# Altium PCB RGB Mcu Badge.PcbDoc
Units mm, origin at the board's own origin, x right, y up, seen from the top; angles counter-clockwise.
Board outline 15 x 15 mm, 4 copper layers (Top Layer, Layer 1, Layer 2, Bottom Layer), stack 0.771 mm thick; 30 components, 23 nets, 90 pads, 29 vias.
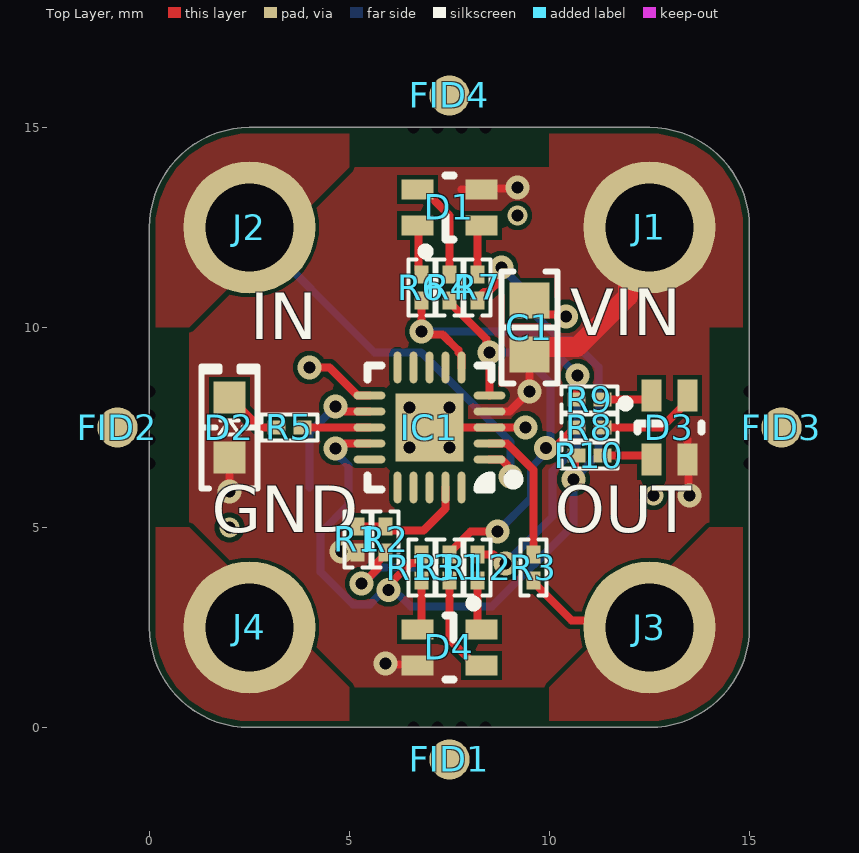
[diagram p0: Top Layer view]
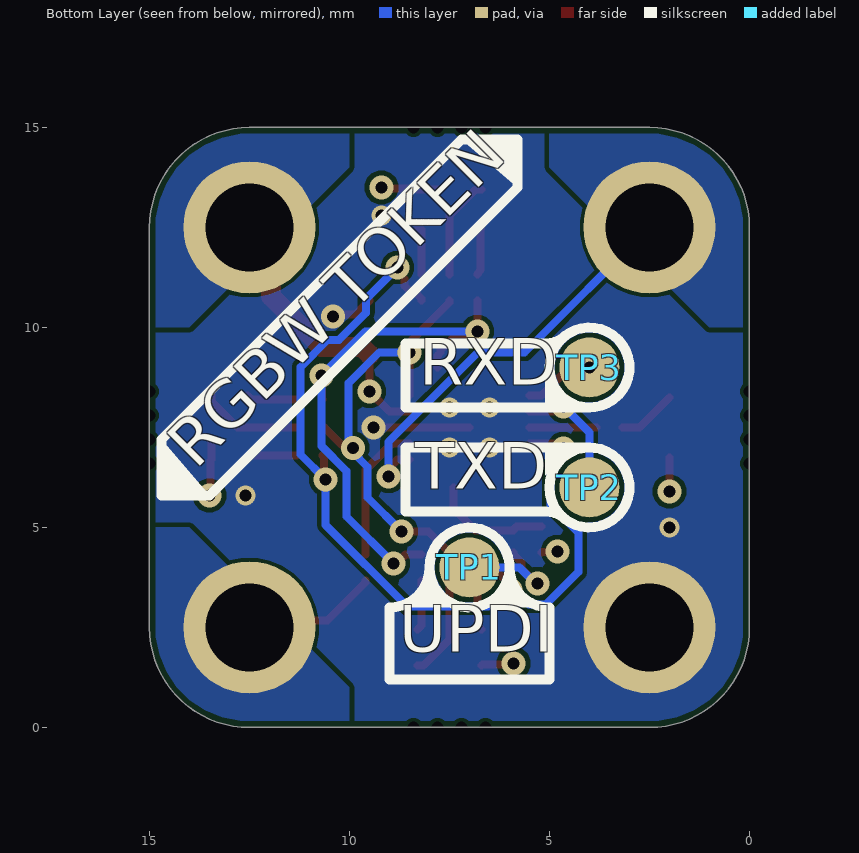
[diagram p1: Bottom Layer view, seen from below]
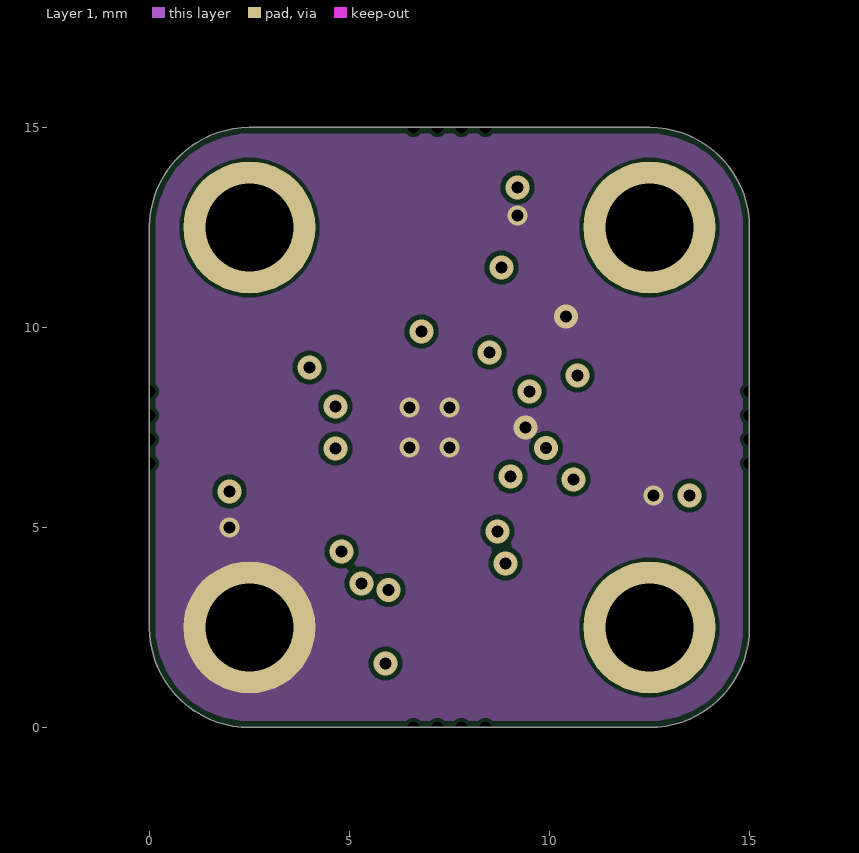
[diagram p2: Layer 1]
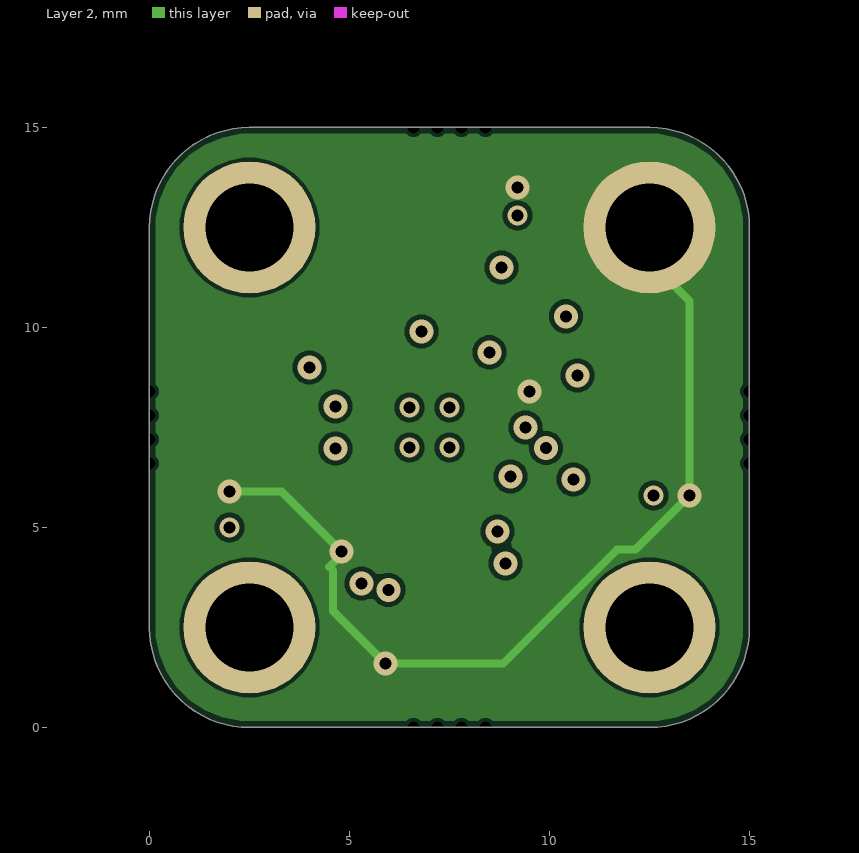
[diagram p3: Layer 2]

## Layer stack, top to bottom
Top Solder: solder mask 0.0102, Solder Resist, Dk 3.8
Top Layer: signal copper 0.035
Dielectric 2: prepreg 0.2104, PP-006, Dk 4.4
Layer 1: signal copper 0.0152
Dielectric 1: dielectric 0.25, FR-4, Dk 4.6
Layer 2: signal copper 0.0152
Dielectric 3: prepreg 0.2104, PP-006, Dk 4.4
Bottom Layer: signal copper 0.035
Bottom Solder: solder mask 0.0102, Solder Resist, Dk 3.8

## Board outline
0,2.5 0,12.5 cw(c2.5,12.5) 2.5,15 12.5,15 cw(c12.5,12.5) 15,12.5 15,2.5 cw(c12.5,2.5) 12.5,0 2.5,0 cw(c2.5,2.5)

## Design rules (kind name [scope] priority, off if disabled: settings)
BoardOutlineClearance [All] p1: gap=0.15 ignorepadtopadclearanceinfootprint=FALSE
Clearance [All] p1: gap=0.12 ignorepadtopadclearanceinfootprint=FALSE except(0.09: Arc-Text Arc-Hole Track-Text Track-Hole SMDPad-SMDPad SMDPad-Text SMDPad-Hole THPad-Via THPad-Fill THPad-Poly THPad-Region THPad-Text THPad-Hole Via-Via Via-Text Via-Hole Fill-Text Fill-Hole Poly-Text Poly-Hole Region-Text Region-Hole Text-Text Text-Hole; 0.2: Arc-THPad Track-THPad SMDPad-THPad; 0.5: THPad-THPad)
ComponentClearance [All] p1: gap=0.254 collisioncheckmode=3 verticalgap=0.254 showdistances=TRUE
MinimumSolderMaskSliver [All] p1: minsoldermaskwidth=0.1
PlaneClearance [All] p1: clearance=0.2
PolygonConnect [All] p1: connectstyle=Direct reliefconductorwidth=0.254 reliefentries=4 polygonreliefangle="90 Angle" airgapwidth=0.254
RoutingVias [All] p1: holewidth=0.3 width=0.6 viastyle="Through Hole" minholewidth=0.15 minwidth=0.45 maxholewidth=6.3 maxwidth=6.6
SilkToSilkClearance [All] p1: silktosilkclearance=-3
SilkToSolderMaskClearance [IsPad] p1: minsilkscreentomaskgap=-3 clearancetoexposedcopper=TRUE
SolderMaskExpansion SolderMaskExpansion_Via [IsVia] p1: expansion=0.102 istentingtop=TRUE
SolderMaskExpansion [All] p2: expansion=0.05 istentingtop=FALSE
Width [All] p1: maxlimit=3 minlimit=0.09 preferedwidth=0.2
25 further rules are at their usual default settings.

## Classes and differential pairs
component class "MCU RGB": C1 D1 D2 D3 D4 FID1 FID2 IC1 J1 J2 J3 J4 R1 R2 R3 R4 R5 R6 R7 R8 R9 R10 R11 R12 R13 TP1 TP2 TP3

## Components (designator, comment, footprint, x,y, rotation, side; value= is the part's Value field where it differs from the comment)
C1 "1 µF" "CAP 0603_1608" 9.5,10 r270 top
D1 "Red, Green, Blue (RGB)" "Harvatek B38G3RGB-10D0003H2U1930" 7.5,13 r90 top
D2 "White" "LED 0603_1608" 2,7.5 r90 top
D3 "Red, Green, Blue (RGB)" "Harvatek B38G3RGB-10D0003H2U1930" 13,7.5 r0 top
D4 "Red, Green, Blue (RGB)" "Harvatek B38G3RGB-10D0003H2U1930" 7.5,2 r270 top
FID1 "Fiducial" Fiducial-1mm 7.5,-0.8 r90 top
FID2 "Fiducial" Fiducial-1mm -0.8,7.5 r90 top
FID3 "Fiducial" Fiducial-1mm 15.8,7.5 r90 top (schematic designator FID2)
FID4 "Fiducial" Fiducial-1mm 7.5,15.8 r270 top (schematic designator FID1)
IC1 "ATTINY416-MFR" "MICROCHIP VQFN-20 3X3 REB" 7,7.5 r180 top
J1 "e-tex pad" "MFR PARTNO" 12.5,12.5 r0 top
J2 "e-tex pad" "MFR PARTNO" 2.5,12.5 r0 top
J3 "e-tex pad" "MFR PARTNO" 12.5,2.5 r0 top
J4 "e-tex pad" "MFR PARTNO" 2.5,2.5 r0 top
R1 "10 kOhms" "RES 0201_0603" 5.2,4.7 r270 top
R2 "330 Ohms" "RES 0201_0603" 5.9,4.7 r270 top
R3 "330 Ohms" "RES 0201_0603" 9.6,4 r270 top
R4 "150 Ohms" "RES 0201_0603" 7.5,11 r270 top
R5 "10 Ohms" "RES 0201_0603" 3.5,7.5 r0 top
R6 "39 Ohms" "RES 0201_0603" 6.8,11 r270 top
R7 "39 Ohms" "RES 0201_0603" 8.2,11 r270 top
R8 "150 Ohms" "RES 0201_0603" 11,7.5 r180 top
R9 "39 Ohms" "RES 0201_0603" 11,8.2 r180 top
R10 "39 Ohms" "RES 0201_0603" 11,6.8 r180 top
R11 "150 Ohms" "RES 0201_0603" 7.5,4 r90 top
R12 "39 Ohms" "RES 0201_0603" 8.2,4 r90 top
R13 "39 Ohms" "RES 0201_0603" 6.8,4 r90 top
TP1 "Test Point" TestPoint-1.5mm 7,4 r180 bottom
TP2 "Test Point" TestPoint-1.5mm 4,6 r90 bottom
TP3 "Test Point" TestPoint-1.5mm 4,9 r90 bottom

## Footprints (in the part's own frame and the unit in brackets; to place one, negate y for a bottom-side part, rotate by r counter-clockwise, add the part's x,y. Pads: shape width x height; smd on the part's side, far side on the other; paste and mask are expansions set on the pad)
"CAP 0603_1608" [mm] "Chip Capacitor, 2-Leads, Body 1.60x0.80mm, IPC Medium Density"
  rect 0.9x1 smd: 1(-0.675,0) 2(0.675,0)
  silkscreen extent -1.4,-0.7 1.4,0.7, body extent -0.8,-0.41 0.8,0.41, height 0.82
Fiducial-1mm [mm]
  round 1 smd paste-1 mask+0.5: F(0,0)
  Top Layer pour cut-out: -1,0 -0.924,0.383 -0.707,0.707 -0.383,0.924 0,1 0,1 0.383,0.924 0.707,0.707 0.924,0.383 1,0 1,0 0.924,-0.383 0.707,-0.707 0.383,-0.924 0,-1 0,-1 -0.383,-0.924 -0.707,-0.707 -0.924,-0.383 -1,0
"Harvatek B38G3RGB-10D0003H2U1930" [mm] "LED RGB COMMON ANODE"
  rect 0.5x0.8 smd paste-2539.97: 1(-0.45,0.8) 2(0.45,0.8) 3(0.45,-0.8) 4(-0.45,-0.8)
  silkscreen extent -1.2,-0.1 0.8,0.7, body extent -0.8,-0.8 0.8,0.8, height 0.4
"LED 0603_1608" [mm] "Chip Diode, 2-Leads, Body 1.60x0.80mm, IPC Medium Density"
  rect 0.8x0.8 smd: 1(-0.75,0) 2(0.75,0)
  silkscreen extent -1.52,-0.7 1.52,0.7, body extent -0.8,-0.4 0.8,0.4, height 0.53
"MFR PARTNO" [mm] "Remember to set Height!"
  round 3.3 hole 2.2 paste-2539.97: 1(0,0)
"MICROCHIP VQFN-20 3X3 REB" [mm] "QFN, 20-Leads, Body 3.00x3.00mm, Pitch 0.40mm, Thermal Pad 1.70x1.70mm, IPC Medium Density"
  oval 0.8x0.2 smd: 1(-1.5,0.8) 2(-1.5,0.4) 3(-1.5,0) 4(-1.5,-0.4) 5(-1.5,-0.8) 11(1.5,-0.8) 12(1.5,-0.4) 13(1.5,0) 14(1.5,0.4) 15(1.5,0.8)
  oval 0.2x0.8 smd: 6(-0.8,-1.5) 7(-0.4,-1.5) 8(0,-1.5) 9(0.4,-1.5) 10(0.8,-1.5) 16(0.8,1.5) 17(0.4,1.5) 18(0,1.5) 19(-0.4,1.5) 20(-0.8,1.5)
  rect 1.7x1.7 smd: 21(0,0)
  silkscreen extent -2.23,-1.55 1.55,1.55, body extent -1.5,-1.5 1.5,1.5, height 0.9
"RES 0201_0603" [mm] "Chip Resistor, 2-Leads, Body 0.60x0.30mm, IPC Medium Density"
  rect 0.44x0.35 smd: 1(-0.325,0) 2(0.325,0)
  silkscreen extent -0.7,-0.33 0.7,0.33, body extent -0.3,-0.15 0.3,0.15, height 0.21
TestPoint-1.5mm [mm]
  round 1.5 smd: 1(0,0)

## Part data
C1: library part GCM188R71E105KA64D, "CAP CER 1UF 25V X7R 0603", Device Package="0603 (1608 Metric)", Manufacturer="Murata Electronics", Operating Temperature="-55°C ~ 125°C", Ratings=AEC-Q200, Supplier Part Number 1=490-10673-1-ND, Temperature Coefficient=X7R, Tolerance=±10%, Voltage - Rated=25V, Applications=Automotive, Capacitance="1 µF", ComponentLink1Description=Datasheet, ComponentLink1URL=https://www.murata.com/~/media/webrenewal/support/library/catalog/products/capacitor/mlcc/c03e.ashx?la=en-us, ComponentLink2Description="DigiKey Link", ComponentLink2URL=https://www.digikey.com/en/products/detail/murata-electronics/GCM188R71E105KA64D/4903956, LastUpdated="20/08/2023 19:09:04", Lifecycle Status=Active, Minimum Order=1, Mounting Type="Surface Mount, MLCC", Package / Case="0603 (1608 Metric)", Packaging=TapeAndReel, Part Number=GCM188R71E105KA64D, Part Status=Active, PartId=6762, Price=0.03, Series=GCM, Size / Dimension="0.063\" L x 0.031\" W (1.60mm x 0.80mm)", Supplier 1=DigiKey, Thickness (Max)="0.035\" (0.90mm)"
D1 D3 D4: library part B38G3RGB-10D0003H2U1930, "LED RGB MIXED WHITE ( 1.6(L)X1.6", Current - Test="10mA Red, 10mA Green, 10mA Blue", Manufacturer="Harvatek Corporation", Millicandela Rating="630mcd Red, 630mcd Green, 630mcd Blue", Supplier Device Package=0606, Supplier Part Number 1=3147-B38G3RGB-10D0003H2U1930CT-ND, Voltage - Forward (Vf) (Typ)="2V Red, 3V Green, 3V Blue", Color="Red, Green, Blue (RGB)", ComponentLink1Description=Datasheet, ComponentLink1URL=https://media.digikey.com/pdf/Data%20Sheets/Harvatek%20PDFs/B38G3RGB-10D0003H2U1930%20%20V1.9.pdf, ComponentLink2Description="DigiKey Link", ComponentLink2URL=https://www.digikey.com/en/products/detail/harvatek-corporation/B38G3RGB-10D0003H2U1930/13588733, Configuration="Common Anode", Height (Max)=0.50mm, LastUpdated="31/10/2023 16:54:14", Lens Size="1.60mm x 1.10mm", Lens Style="Rectangle with Flat Top", Lifecycle Status=Active, Minimum Order=1, Mounting Type="Surface Mount", Packaging=TapeAndReel, Part Number=B38G3RGB-10D0003H2U1930, Part Status=Active, PartId=1416, Price=0.11, Series=-, Size / Dimension="1.60mm L x 1.60mm W", Supplier 1=DigiKey
D2: library part B1931TW--20P000314U1930, "1.6(L)X0.8(W)X0.4(H) MM WHITE LE", Current - Test=20mA, Device Package="0603 (1608 Metric)", Manufacturer="Harvatek Corporation", Millicandela Rating=420mcd, Supplier Device Package=0603, Supplier Part Number 1=3147-B1931TW--20P000314U1930CT-ND, Voltage - Forward (Vf) (Typ)=3.2V, Color=White, ComponentLink1Description=Datasheet, ComponentLink1URL=https://media.digikey.com/pdf/Data%20Sheets/Harvatek%20PDFs/B1931TW--20P000314U1930.pdf, ComponentLink2Description="DigiKey Link", ComponentLink2URL=https://www.digikey.com/en/products/detail/harvatek-corporation/B1931TW-20P000314U1930/14302790, Height (Max)=0.50mm, LastUpdated="30/10/2023 20:29:06", Lens Size="1.00mm x 0.80mm", Lens Style="Rectangle with Flat Top", Lifecycle Status=Active, Minimum Order=1, Mounting Type="Surface Mount", Package / Case="0603 (1608 Metric)", Packaging=TapeAndReel, Part Number=B1931TW--20P000314U1930, Part Status=Active, PartId=1057, Price=0.05, Series=-, Size / Dimension="1.60mm L x 0.80mm W", Supplier 1=DigiKey, Viewing Angle=135°
FID1 FID2 FID3 FID4: library part CMP-002-000000-1, Component Type=Standard, Design Item ID=Fiducial, Pin Count=0, Source=Fiducial.SchLib
IC1: "IC MCU 8BIT 4KB FLASH 20VQFN", Manufacturer="Microchip Technology", Operating Temperature="-40°C ~ 125°C (TA)", Package / Case="20-VFQFN Exposed Pad", Supplier Device Package="20-VQFN (3x3)", Supplier Part Number 1=ATTINY416-MFRCT-ND, Voltage - Supply (Vcc/Vdd)="2.7V ~ 5.5V", ComponentLink1Description=Datasheet, ComponentLink1URL=http://www.microchip.com/mymicrochip/filehandler.aspx?ddocname=en599406, ComponentLink2Description="DigiKey Link", ComponentLink2URL=https://www.digikey.com/en/products/detail/microchip-technology/ATTINY416-MFR/7682214, Connectivity="I²C, IrDA, LINbus, SPI, UART/USART", Core Processor=AVR, Core Size=8-Bit, Data Converters="A/D 12x10b; D/A 1x8b", EEPROM Size="128 x 8", LastUpdated="30/10/2023 22:46:36", Lifecycle Status=Active, Minimum Order=1, Mounting Type="Surface Mount", Number of I/O=18, Oscillator Type=Internal, Packaging=TapeAndReel, Part Number=ATTINY416-MFR, Part Status=Active, PartId=286, Peripherals="Brown-out Detect/Reset, POR, WDT", Price=0.66, Program Memory Size="4KB (4K x 8)", Program Memory Type=FLASH, RAM Size="256 x 8", Series="tinyAVR™ 1, Functional Safety (FuSa)", Speed=16MHz, Supplier 1=DigiKey
R1: library part CR0201-JW-103GLF, "RES SMD 10K OHM 5% 1/20W 0201", Device Package="0201 (0603 Metric)", Manufacturer="Bourns Inc.", Operating Temperature="-55°C ~ 125°C", Power (Watts)="0.05W, 1/20W", Supplier Device Package=0201, Supplier Part Number 1=CR0201-JW-103GLFCT-ND, Temperature Coefficient=±200ppm/°C, Tolerance=±5%, ComponentLink1Description=Datasheet, ComponentLink1URL=https://www.bourns.com/docs/Product-Datasheets/CR0201.pdf, ComponentLink2Description="DigiKey Link", ComponentLink2URL=https://www.digikey.com/en/products/detail/bourns-inc/CR0201-JW-103GLF/3593182, Composition="Thick Film", Height - Seated (Max)="0.010\" (0.26mm)", LastUpdated="30/10/2023 19:19:08", Lifecycle Status=Active, Minimum Order=1, Number of Terminations=2, Package / Case="0201 (0603 Metric)", Packaging=CutTape, Part Number=CR0201-JW-103GLF, Part Status=Active, PartId=2265, Price=0.01, Resistance="10 kOhms", Series=CR0201, Size / Dimension="0.024\" L x 0.012\" W (0.60mm x 0.30mm)", Supplier 1=DigiKey
R2 R3: library part WR02X3300FAL, "RES 330 OHM 1% 1/20W 0201", Device Package="0201 (0603 Metric)", Manufacturer="Walsin Technology Corporation", Operating Temperature="-55°C ~ 125°C", Power (Watts)="0.05W, 1/20W", Supplier Device Package=0201, Supplier Part Number 1=1292-WR02X3300FALCT-ND, Temperature Coefficient=±200ppm/°C, Tolerance=±1%, ComponentLink1Description=Datasheet, ComponentLink1URL=https://www.passivecomponent.com/wp-content/uploads/chipR/ASC_WR02X.pdf, ComponentLink2Description="DigiKey Link", ComponentLink2URL=https://www.digikey.com/en/products/detail/walsin-technology-corporation/WR02X3300FAL/13240814, Composition="Thick Film", Height - Seated (Max)="0.010\" (0.26mm)", LastUpdated="30/10/2023 19:18:56", Lifecycle Status=Active, Minimum Order=1, Number of Terminations=2, Package / Case="0201 (0603 Metric)", Packaging=CutTape, Part Number=WR02X3300FAL, Part Status=Active, PartId=64460, Price=0.01, Resistance="330 Ohms", Series=WR02X, Size / Dimension="0.024\" L x 0.012\" W (0.60mm x 0.30mm)", Supplier 1=DigiKey
R4 R8 R11: library part "WR02X151 JAL", "RES 150 OHM 5% 1/20W 0201", Device Package="0201 (0603 Metric)", Manufacturer="Walsin Technology Corporation", Operating Temperature="-55°C ~ 125°C", Power (Watts)="0.05W, 1/20W", Supplier Device Package=0201, Supplier Part Number 1=1292-WR02X151JALCT-ND, Temperature Coefficient=±200ppm/°C, Tolerance=±5%, ComponentLink1Description=Datasheet, ComponentLink1URL=https://www.passivecomponent.com/wp-content/uploads/chipR/ASC_WR02X.pdf, ComponentLink2Description="DigiKey Link", ComponentLink2URL=https://www.digikey.com/en/products/detail/walsin-technology-corporation/WR02X151-JAL/13240963, Composition="Thick Film", Height - Seated (Max)="0.010\" (0.26mm)", LastUpdated="30/10/2023 19:18:56", Lifecycle Status=Active, Minimum Order=1, Number of Terminations=2, Package / Case="0201 (0603 Metric)", Packaging=CutTape, Part Number="WR02X151 JAL", Part Status=Active, PartId=64480, Price=0.01, Resistance="150 Ohms", Series=WR02X, Size / Dimension="0.024\" L x 0.012\" W (0.60mm x 0.30mm)", Supplier 1=DigiKey
R5: library part WR02X10R0FAL, "RES 10 OHM 1% 1/20W 0201", Device Package="0201 (0603 Metric)", Manufacturer="Walsin Technology Corporation", Operating Temperature="-55°C ~ 125°C", Power (Watts)="0.05W, 1/20W", Supplier Device Package=0201, Supplier Part Number 1=1292-WR02X10R0FALCT-ND, Temperature Coefficient=±200ppm/°C, Tolerance=±1%, ComponentLink1Description=Datasheet, ComponentLink1URL=https://www.passivecomponent.com/wp-content/uploads/chipR/ASC_WR02X.pdf, ComponentLink2Description="DigiKey Link", ComponentLink2URL=https://www.digikey.com/en/products/detail/walsin-technology-corporation/WR02X10R0FAL/13240733, Composition="Thick Film", Height - Seated (Max)="0.010\" (0.26mm)", LastUpdated="30/10/2023 19:18:56", Lifecycle Status=Active, Minimum Order=1, Number of Terminations=2, Package / Case="0201 (0603 Metric)", Packaging=CutTape, Part Number=WR02X10R0FAL, Part Status=Active, PartId=64452, Price=0.01, Resistance="10 Ohms", Series=WR02X, Size / Dimension="0.024\" L x 0.012\" W (0.60mm x 0.30mm)", Supplier 1=DigiKey
R6 R7 R9 R10 R12 R13: library part CR0201-JW-390GLF, "RES SMD 39 OHM 5% 1/20W 0201", Device Package="0201 (0603 Metric)", Manufacturer="Bourns Inc.", Operating Temperature="-55°C ~ 125°C", Power (Watts)="0.05W, 1/20W", Supplier Device Package=0201, Supplier Part Number 1=118-CR0201-JW-390GLFCT-ND, Temperature Coefficient=±200ppm/°C, Tolerance=±5%, ComponentLink1Description=Datasheet, ComponentLink1URL=https://www.bourns.com/docs/product-datasheets/cr.pdf?sfvrsn=574d41f6_14, ComponentLink2Description="DigiKey Link", ComponentLink2URL=https://www.digikey.com/en/products/detail/bourns-inc/CR0201-JW-390GLF/3783095, Composition="Thick Film", Height - Seated (Max)="0.010\" (0.26mm)", LastUpdated="30/10/2023 19:18:53", Lifecycle Status=Active, Minimum Order=1, Number of Terminations=2, Package / Case="0201 (0603 Metric)", Packaging=CutTape, Part Number=CR0201-JW-390GLF, PartId=78563, Price=0.01, Resistance="39 Ohms", Series=CR0201, Size / Dimension="0.024\" L x 0.012\" W (0.60mm x 0.30mm)", Supplier 1=DigiKey
TP1 TP2 TP3: library part CMP-003-000000-1, Component Type="Standard (No BOM)", Design Item ID="Test Point", Pin Count=1, Source="Test Point.SchLib"

## Free pads (board coordinates)
  round 0 hole 0.3 unplated paste-2539.97: M2(0,7.8) M2(7.2,0) M2(7.8,15) M2(15,7.2) M3(0,6.6) M3(0,7.2) M3(0,8.4) M3(6.6,0) M3(6.6,15) M3(7.2,15) M3(7.8,0) M3(8.4,0) M3(8.4,15) M3(15,6.6) M3(15,7.8) M3(15,8.4)

## Via types
v1: diameter 0.6, hole 0.3, Top Layer to Bottom Layer, tented both sides, 22 vias
v2: diameter 0.5, hole 0.3, Top Layer to Bottom Layer, tented both sides, 7 vias

## Nets (pads, with @x,y where several pads share a name; then routed paths per layer and width w, separated by ;. In a path a pad name is that pad's centre, name@x,y a point inside that pad or via, vN(x,y) a via of type N, cw(c..) or ccw(c..) an arc to the next point about the centre after c; other vN are vias at no path point)
3V3: C1.2 D1.3 D2.1 D3.3 D4.3 IC1.4 J1.1 R1.2 | length 35.3
  Top Layer w0.2: v1(2,5.9) D2.1 ; v1(4.8,4.4) 4.812,4.387 5.188,4.387 R1.2 ; v1(5.9,1.6) 5.925,1.575 6.675,1.575 D4.3 ; 7.8,13.45 D1.3 8.325,13.475 9.175,13.475 v1(9.2,13.5) ; IC1.4 9,7.9 v1(9.5,8.4) C1.2 ; 13.45,7.2 D3.3 13.475,6.675 13.475,5.825 v1(13.5,5.8)
  Top Layer w0.5: C1.2 9.685,9.51 10.694,9.51 11.964,10.78 11.964,11.964 J1.1
  Layer 2 w0.2: v1(2,5.9) 3.3,5.9 v1(4.8,4.4) 4.8,4.319 4.487,4.006 ; 4.591,3.927 4.591,2.909 v1(5.9,1.6) 8.842,1.6 11.692,4.45 12.15,4.45 v1(13.5,5.8) 13.5,10.661 12.5,11.661 J1.1
BLUE: IC1.14 R7.2 R10.2 R13.2 | length 22.4
  Top Layer w0.2: v1(4.654,6.97) 4.762,6.97 4.892,7.1 IC1.14 ; v1(5.972,3.442) 6.048,3.518 6.048,3.629 6.534,4.115 6.635,4.115 6.8,4.28 R13.2 ; R7.2 8.2,10.72 8.365,10.885 8.466,10.885 8.619,11.038 8.619,11.211 ; v1(10.6,6.2) 10.637,6.237 10.637,6.763 R10.2
  Bottom Layer w0.2: v1(4.654,6.97) 4.654,6.862 4.97,6.546 4.97,5.56 4.28,4.87 4.28,3.885 5.085,3.08 5.515,3.08 5.877,3.442 v1(5.972,3.442) ; 6.279,3.279 6.528,3.03 8.565,3.03 10.6,5.065 v1(10.6,6.2) 11.22,6.82 11.22,9.015 10.544,9.692 10.261,9.692 9.585,10.368 9.585,10.715 v1(8.8,11.5)
GND: C1.1 IC1.3 IC1.21 J4.1 | length 3.5
  Top Layer w0.2: IC1.21 IC1.3 v1(9.4,7.5) ; C1.1 9.85,10.325 10.174,10.325 10.223,10.276 10.404,10.276 v1(10.408,10.28)
  other v2: 2,5 12.6,5.8 6.5,7 7.5,7 6.5,8 7.5,8 9.2,12.8
GREEN: IC1.6 R6.2 R9.2 R12.2 | length 13.6
  Top Layer w0.2: R6.2 v1(6.8,9.9) 6.877,9.823 7.329,9.823 7.72,9.433 7.72,9.38 7.8,9.3 IC1.6 ; R12.2 8.598,4.325 8.823,4.1 v1(8.9,4.1) ; R9.2 10.687,8.213 10.687,8.788 v1(10.7,8.8)
  Bottom Layer w0.2: v1(6.8,9.9) 9.6,9.9 v1(10.7,8.8) 10.7,7.035 10.08,6.415 10.08,5.28 v1(8.9,4.1)
INPUT: IC1.1 J2.1 | length 10.4
  Top Layer w0.2: IC1.1 8.8,6.7 8.947,6.553 8.947,6.353 v1(9.023,6.277)
  Bottom Layer w0.2: J2.1 5.62,9.38 6.785,9.38 9.023,7.141 v1(9.023,6.277)
NetD1_1: D1.1 R6.1 | length 1.2
  Top Layer w0.2: D1.1 6.725,12.4 6.725,11.445 R6.1
NetD1_2: D1.2 R4.1 | length 2.5
  Top Layer w0.2: D1.2 6.85,13.45 7.5,12.8 R4.1
NetD1_4: D1.4 R7.1 | length 1.3
  Top Layer w0.2: R7.1 8.2,12.45 D1.4
NetD2_2: D2.2 R5.1 | length 1.5
  Top Layer w0.2: D2.2 2.75,7.5 R5.1
NetD3_1: D3.1 R9.1 | length 1.3
  Top Layer w0.2: R9.1 12.45,8.2 D3.1
NetD3_2: D3.2 R8.1 | length 2.5
  Top Layer w0.2: R8.1 12.8,7.5 13.45,8.15 D3.2
NetD3_4: D3.4 R10.1 | length 1.3
  Top Layer w0.2: R10.1 12.45,6.8 D3.4
NetD4_1: D4.1 R12.1 | length 1.3
  Top Layer w0.2: R12.1 8.2,2.55 D4.1
NetD4_2: D4.2 R11.1 | length 2.5
  Top Layer w0.2: R11.1 7.5,2.2 8.15,1.55 D4.2
NetD4_4: D4.4 R13.1 | length 1.3
  Top Layer w0.2: D4.4 6.8,2.55 R13.1
O: IC1.2 R3.1 | length 3.5
  Top Layer w0.2: IC1.2 8.935,7.1 9.6,6.435 R3.1
OUTPUT: J3.1 R3.2 | length 3.4
  Top Layer w0.2: R3.2 9.6,3.63 10.55,2.68 12.32,2.68 J3.1
RED: IC1.5 R4.2 R8.2 R11.2 | length 11.3
  Top Layer w0.2: R11.2 7.5,4.37 8.03,4.9 v1(8.7,4.9) ; R4.2 7.5,10.63 8.423,9.707 8.423,9.477 8.5,9.4 IC1.5 ; v1(9.915,6.985) 9.991,7.062 10.192,7.062 10.63,7.5 R8.2
  Bottom Layer w0.2: v1(8.5,9.38) 9.255,9.38 10.02,8.615 10.02,7.199 9.915,7.094 v1(9.915,6.985) ; v1(8.7,4.9) 9.543,5.743 9.543,6.508 9.92,6.885 v1@9.92,6.98
RESET_UPDI: IC1.19 R1.1 R2.1 | length 3
  Top Layer w0.2: R1.1 5.825,5.025 5.9,4.95 5.9,4.925 6.849,4.925 7.4,5.476 IC1.19
UPDI: R2.2 TP1.1 | length 2.8
  Top Layer w0.2: v1(5.3,3.6) 5.331,3.6 5.695,3.964 5.695,4.125 5.9,4.33 R2.2
  Bottom Layer w0.2: v1(5.3,3.6) 5.349,3.6 5.749,4 6.766,4 TP1.1@6.883,4.117
USART_RXD: IC1.11 TP3.1 | length 1.8
  Top Layer w0.2: v1(4,9) 4.5,9 5.2,8.3 IC1.11
USART_TXD: IC1.12 TP2.1 | length 3.2
  Top Layer w0.2: v1(4.649,8.026) 4.757,8.026 4.884,7.9 IC1.12
  Bottom Layer w0.2: TP2.1 4,7.378 v1(4.649,8.026)
WHITE: IC1.13 R5.2 | length 1.7
  Top Layer w0.2: R5.2 IC1.13
pads on no net: FID1.F FID2.F FID3.F FID4.F IC1.7 IC1.8 IC1.9 IC1.10 IC1.15 IC1.16 IC1.17 IC1.18 IC1.20

## Polygon pours and split planes (outlines as drawn)
OUTPUT on Top Layer "OUTPUT_L01_P000" (solid, remove dead copper, pour order 0): 10,0 10,1 14,5 15,5 15,2.5 cw(c12.5,2.5) 12.5,0
3V3 on Top Layer "3V3_L01_P011" (solid, remove dead copper, pour order 11): 1,14 1,1 14,1 14,14
GND on Top Layer "GND_L01_P003" (solid, remove dead copper, pour order 3): 0,5 1,5 5,1 5,0 2.5,0 cw(c2.5,2.5) 0,2.5
INPUT on Top Layer "INPUT_L01_P002" (solid, remove dead copper, pour order 2): 5,15 5,14 1,10 0,10 0,12.5 cw(c2.5,12.5) 2.5,15
3V3 on Top Layer "3V3_L01_P001" (solid, remove dead copper, pour order 1): 15,10 14,10 10,14 10,15 12.5,15 cw(c12.5,12.5) 15,12.5
OUTPUT on Bottom Layer "OUTPUT_L04_P005" (solid, remove dead copper, pour order 5): 10,0 10,1 14,5 15,5 15,2.5 cw(c12.5,2.5) 12.5,0
GND on Bottom Layer "GND_L04_P010" (solid, remove dead copper, pour order 10): 0,15 0,0 15,0 15,15
INPUT on Bottom Layer "INPUT_L04_P007" (solid, remove dead copper, pour order 7): 5,15 5,14 1,10 0,10 0,12.5 cw(c2.5,12.5) 2.5,15
3V3 on Bottom Layer "3V3_L04_P006" (solid, remove dead copper, pour order 6): 15,10 14,10 10,14 10,15 12.5,15 cw(c12.5,12.5) 15,12.5
GND on Bottom Layer "GND_L04_P004" (solid, remove dead copper, pour order 4): 0,5 1,5 5,1 5,0 2.5,0 cw(c2.5,2.5) 0,2.5
3V3 on Layer 2 "3V3_L03_P008" (solid, remove dead copper, pour order 8): 0,15 0,0 15,0 15,15
GND on Layer 1 "GND_L02_P009" (solid, remove dead copper, pour order 9): 0,0 0,15 15,15 15,0

## Silkscreen, mask and mechanical layers (free items; w line width, h text height)
Top Overlay:
  text "VIN" at 10.515,9.418 h2
  text "IN" at 2.513,9.318 h2
  text "GND" at 1.561,4.497 h2
  text "OUT" at 10.126,4.497 h2
Bottom Overlay:
  circle w0.25: c4,9 r1
  circle w0.25: c4,6 r1
  circle w0.25: c7,4 r1
  region: 6,4 cw(c5,4) 5,3 7,3 cw(c7,4)
  region: 8,4 ccw(c9,4) 9,3 7,3 ccw(c7,4)
  region: 7.2,14.7 5.8,13.5 5.8,14.7
  region: 14.7,7.2 14.7,5.8 13.5,5.8
  region: 5.1,8 4.3,8 5.1,8.7
  region: 5.1,7 4.3,7 5.1,6.3
  lines w0.25: 4,7 8.6,7 8.6,5.4 5.083,5.4 ccw(c5.083,4.717) 4.6,5.2 4.665,5.265 cw(c4.688,5.241) 4.688,5.274 ; 4,8 8.6,8 8.6,9.6 5.083,9.6 cw(c5.083,10.283) 4.6,9.8 4.665,9.735 ccw(c4.688,9.759) 4.688,9.726 ; 6,4 cw(c5,4) 5,3 5,1.2 9,1.2 9,3 cw(c9,4) 8,4 ; 5.8,13.5 13.5,5.8 14.7,5.8 14.7,7.2 7.2,14.7 5.8,14.7 5.8,13.5
  text "RXD" at 8.25,8.178 h2
  text "RGBW TOKEN" at 13.569,6.16 h2 r315
  text "TXD" at 8.362,5.58 h2
  text "UPDI" at 8.753,1.51 h2
Top Solder:
  region: 5,0 2.54,0 cw(c2.54,2.54) 0,2.54 0,5 1,5 5,1
  region: 0,10 0,12.46 cw(c2.54,12.46) 2.54,15 5,15 5,14 1,10
  region: 10,15 12.46,15 cw(c12.46,12.46) 15,12.46 15,10 14,10 10,14
  region: 15,5 15,2.54 cw(c12.46,2.54) 12.46,0 10,0 10,1 14,5
Bottom Solder:
  region: 0,10 0,12.46 cw(c2.54,12.46) 2.54,15 5,15 5,14 1,10
  region: 10,15 12.46,15 cw(c12.46,12.46) 15,12.46 15,10 14,10 10,14
  region: 15,5 15,2.54 cw(c12.46,2.54) 12.46,0 10,0 10,1 14,5
  region: 5,0 2.54,0 cw(c2.54,2.54) 0,2.54 0,5 1,5 5,1
Board Shape:
  the board outline again, w0.2
Route Tool Path:
  lines w1.6: -0.8,5.6 -0.8,2.5 ccw(c2.5,2.5) 2.5,-0.8 5.6,-0.8 ; -0.8,9.4 -0.8,12.5 cw(c2.5,12.5) 2.5,15.8 5.6,15.8 ; 9.4,-0.8 12.5,-0.8 ccw(c12.5,2.5) 15.8,2.5 15.8,5.6 ; 9.4,15.8 12.5,15.8 cw(c12.5,12.5) 15.8,12.5 15.8,9.4